# Altium PCB PCB3.PcbDoc
Units mil, origin at the board's own origin, x right, y up, seen from the top; angles counter-clockwise.
Board outline 3965.03 x 3405.03 mil, 2 copper layers (Top Layer, Bottom Layer); 50 components, 53 nets, 201 pads, 12 vias.
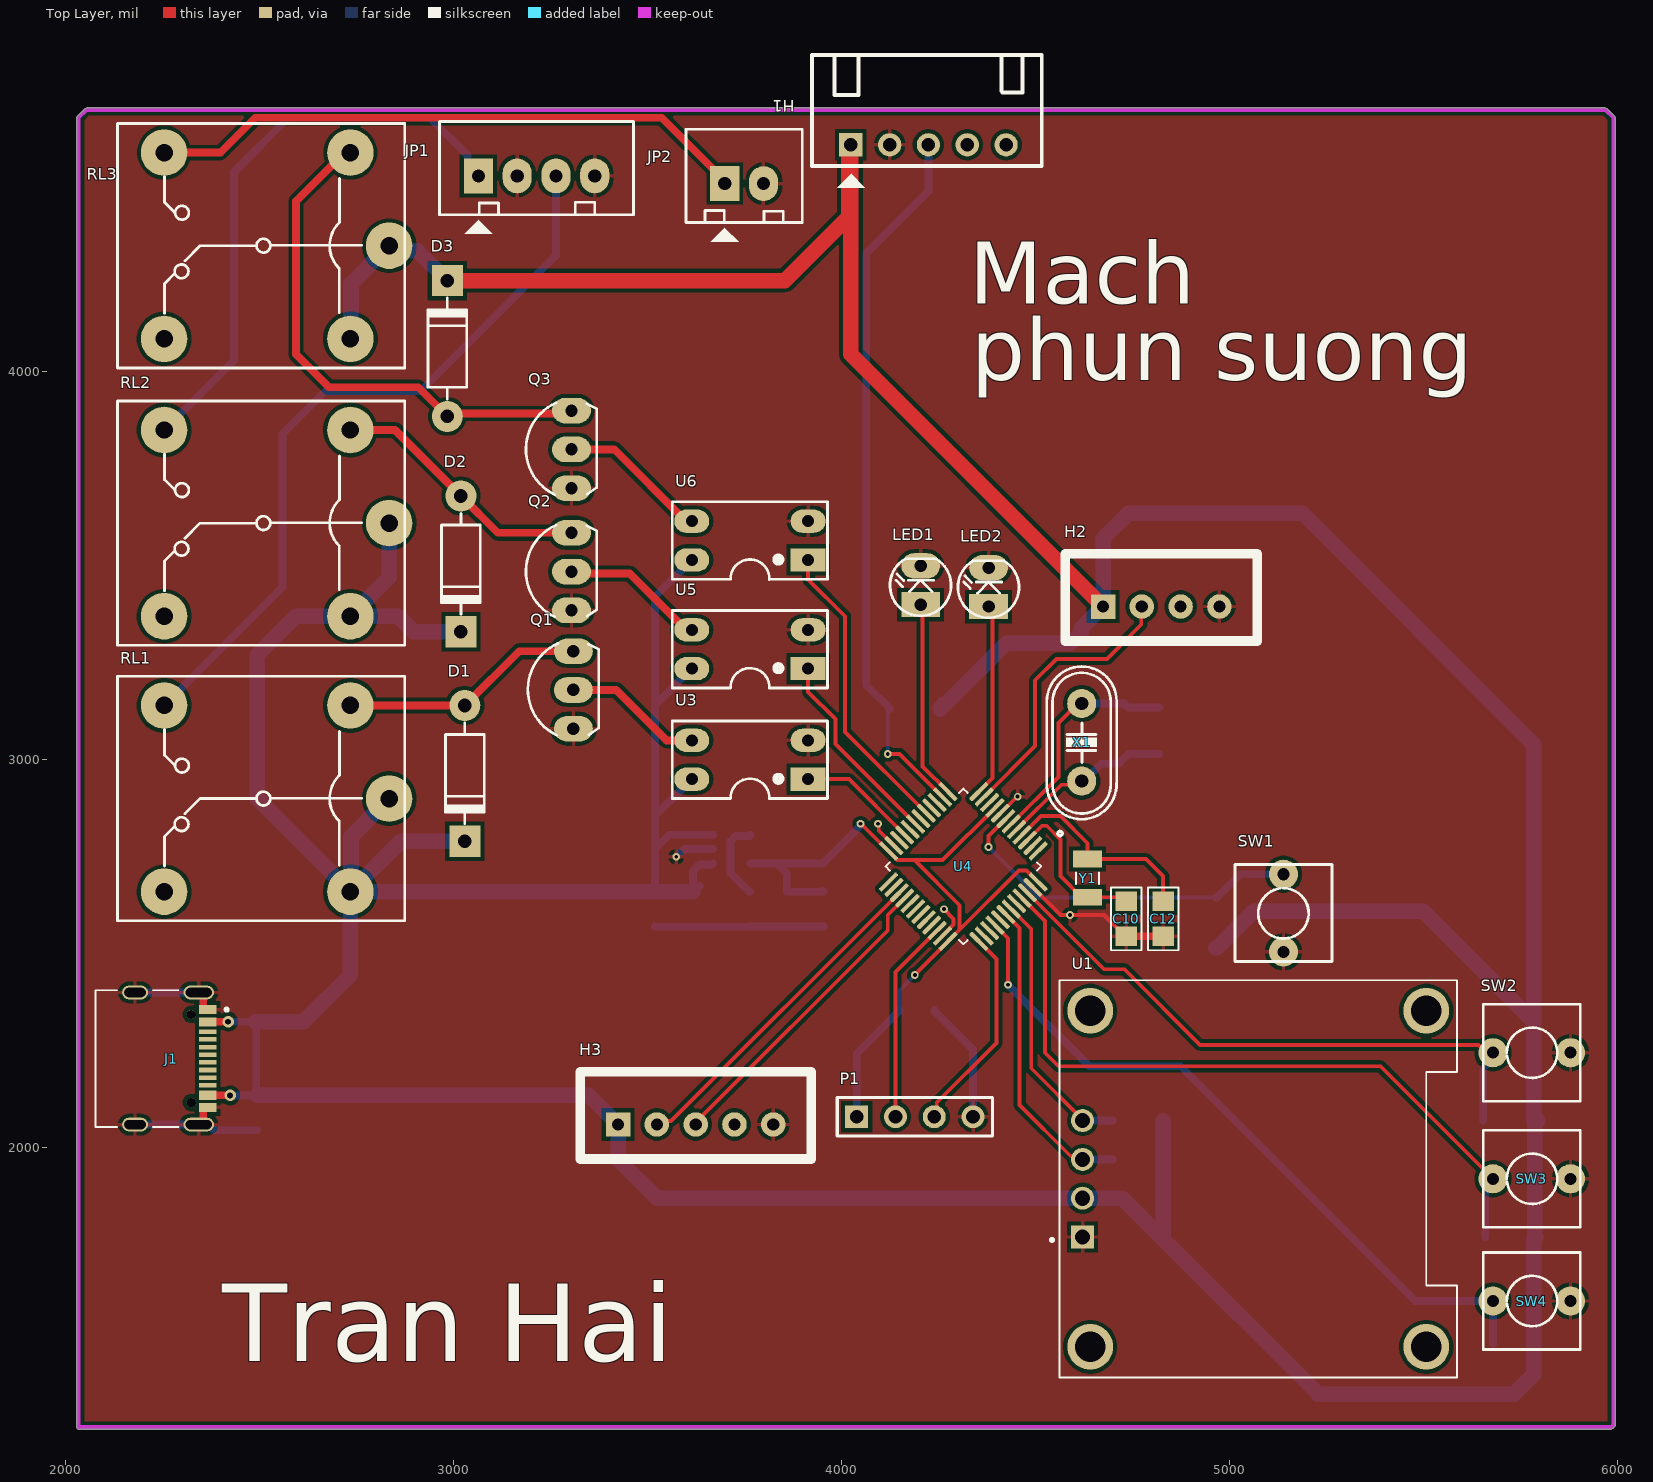
[diagram p0: Top Layer view]
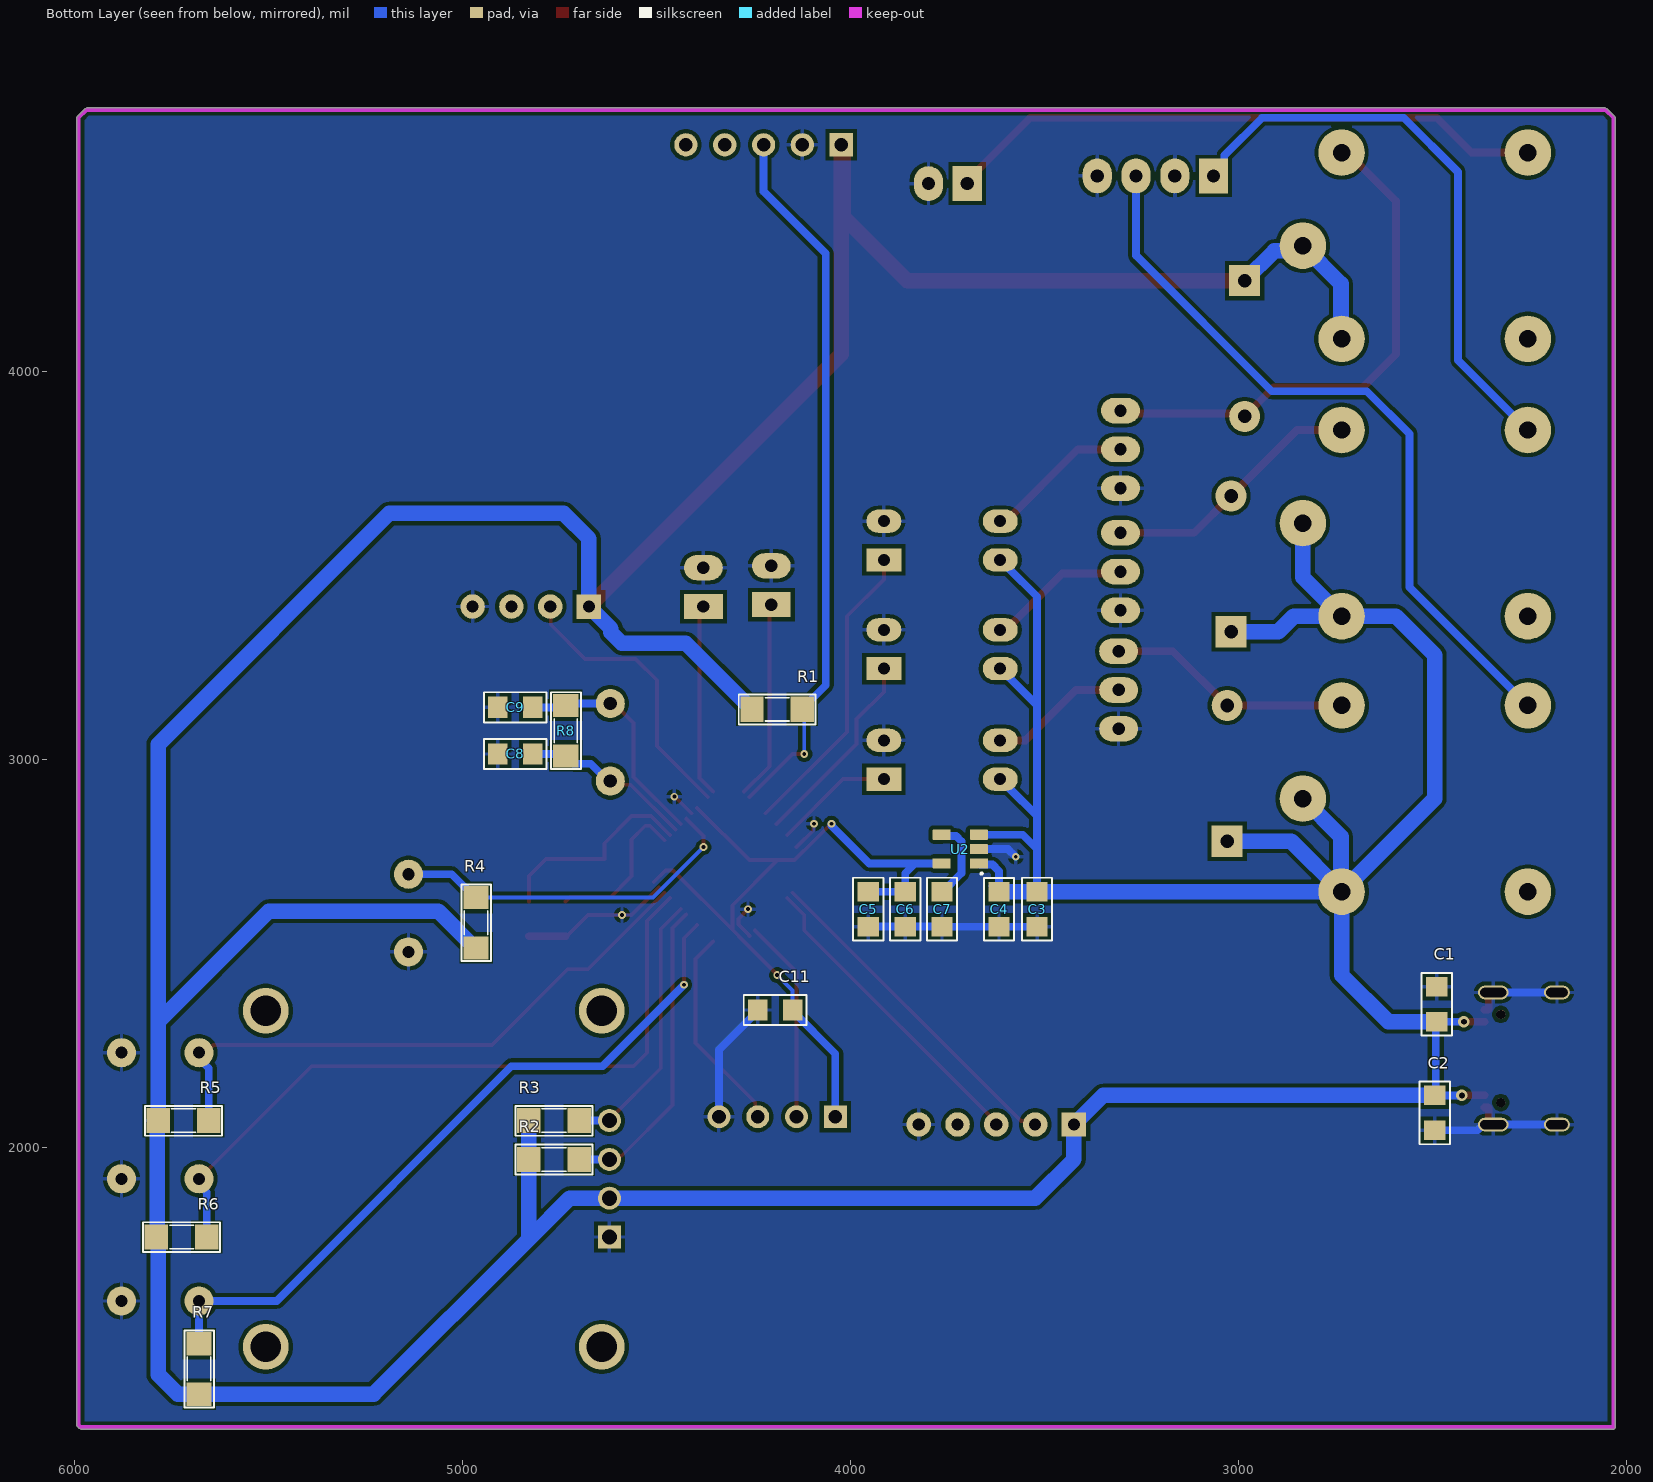
[diagram p1: Bottom Layer view, seen from below]
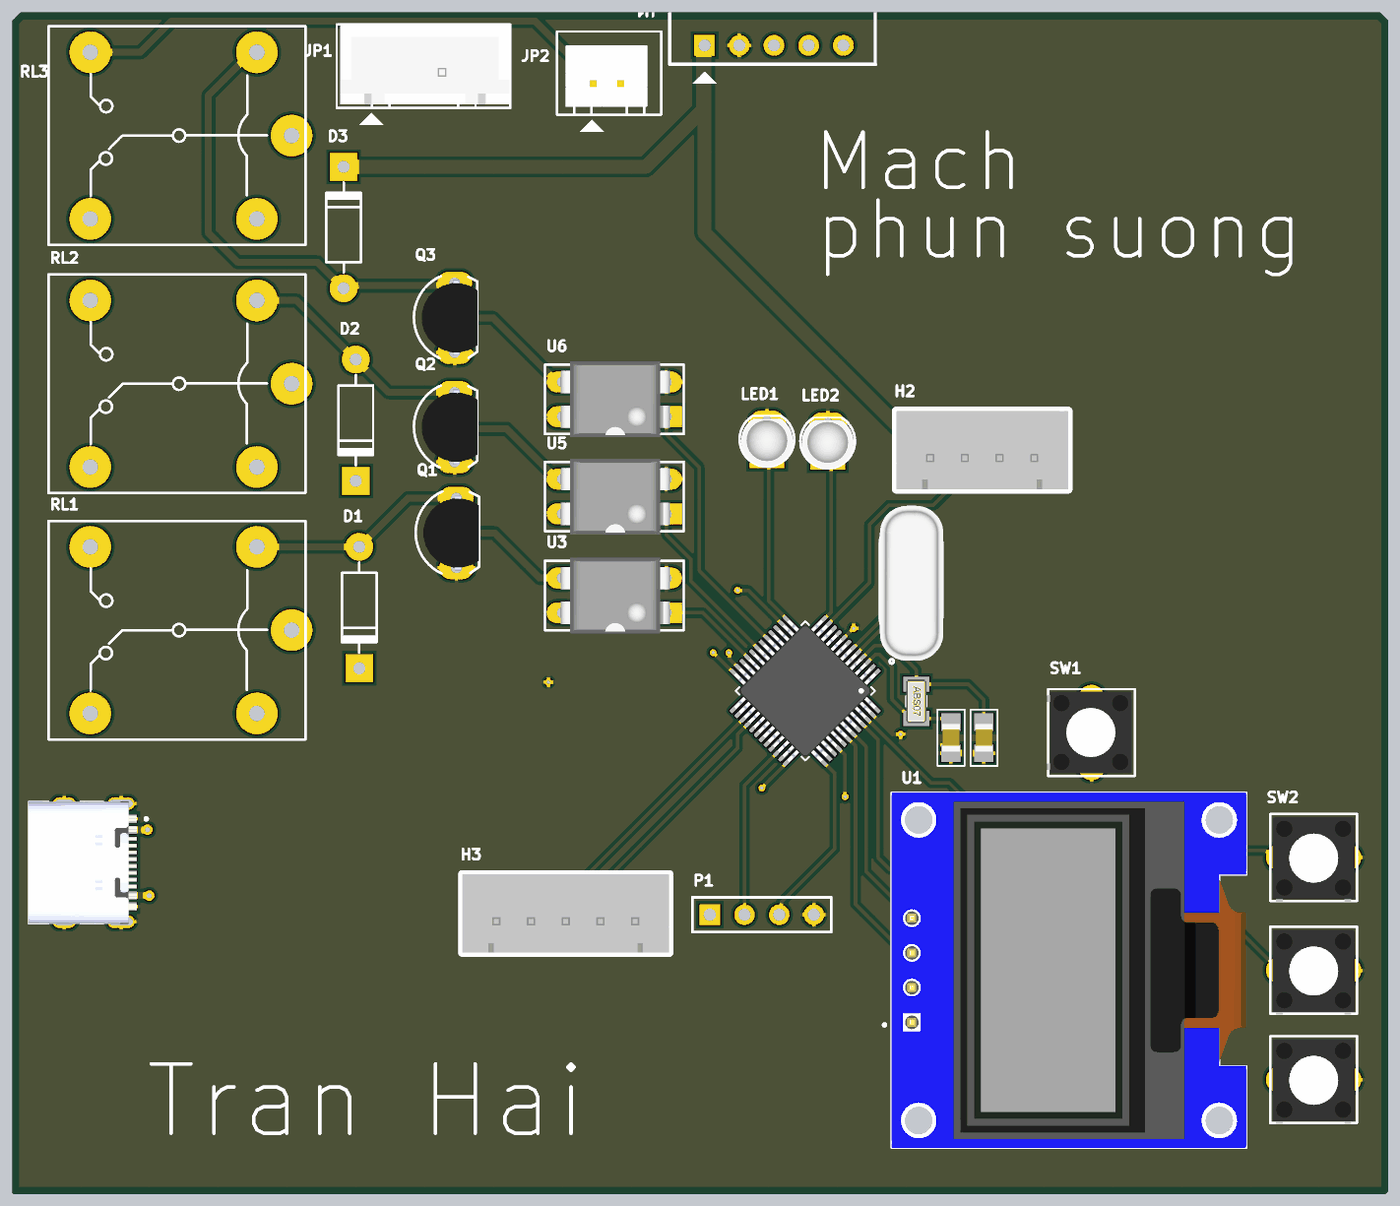
[diagram p2: 3D render of the assembled board from above, using the file's embedded part models]
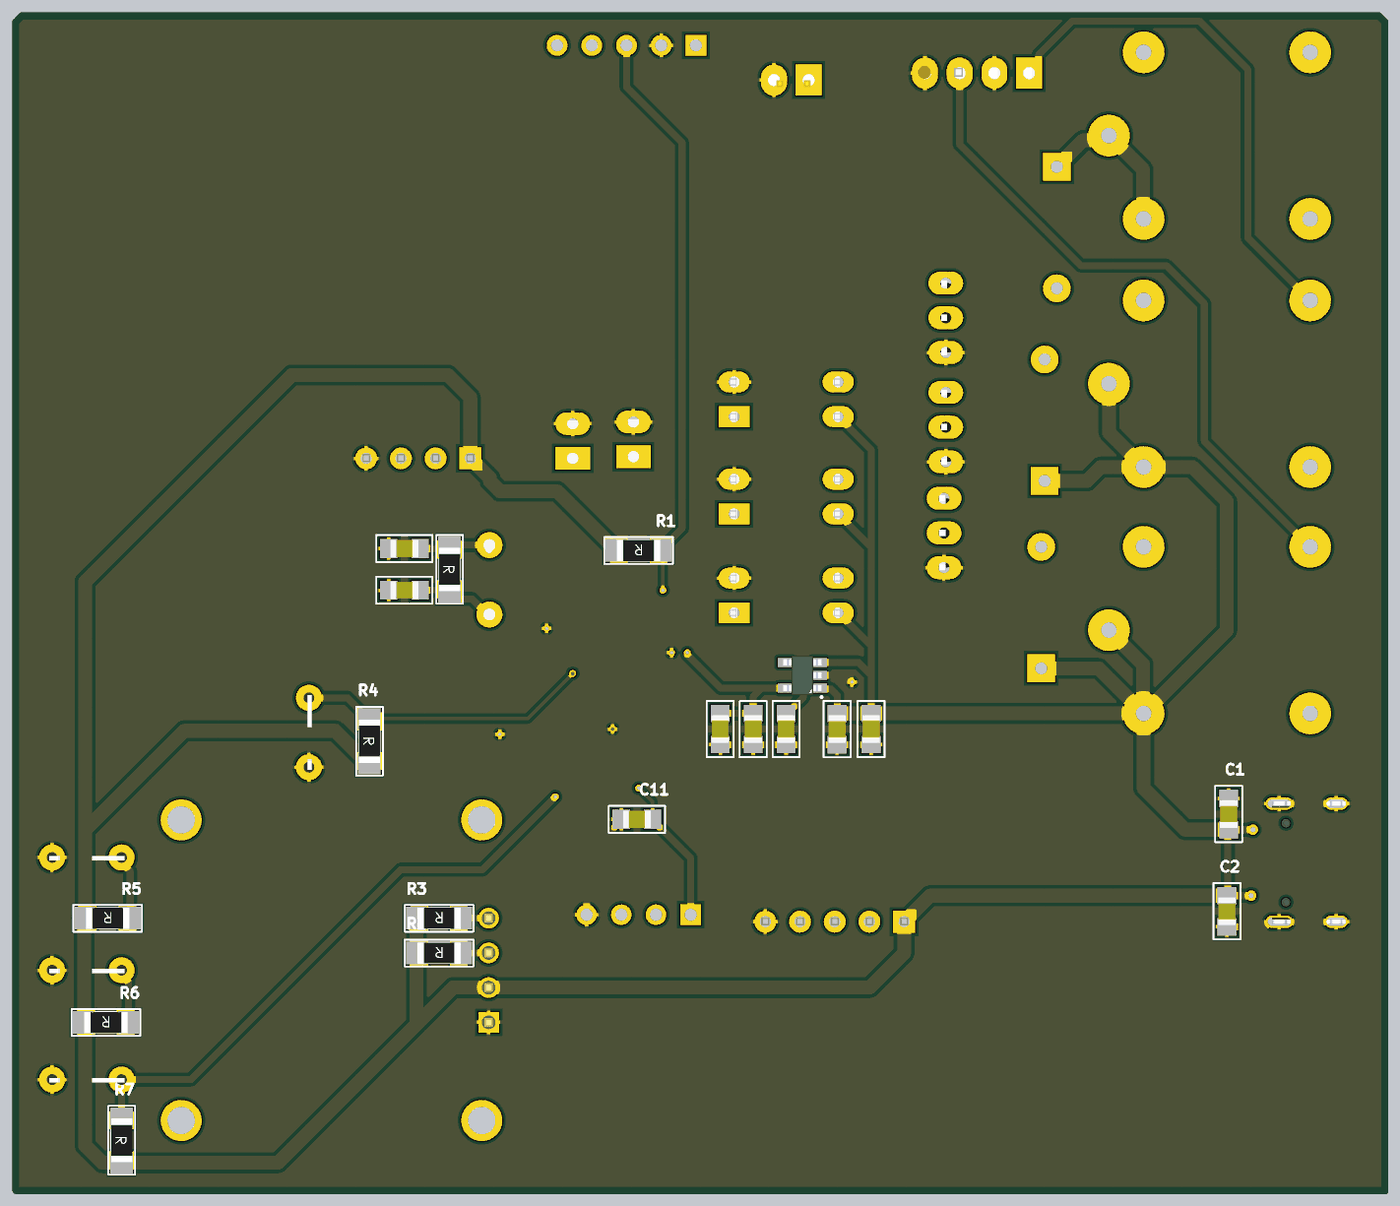
[diagram p3: 3D render of the assembled board from below, using the file's embedded part models]

## Layer stack, top to bottom
Top Solder: solder mask 0.4, Solder Resist, Dk 3.5
Top Layer: signal copper 1.4
Dielectric 1: dielectric 12.6, FR-4, Dk 4.8
Bottom Layer: signal copper 1.4
Bottom Solder: solder mask 0.4, Solder Resist, Dk 3.5

## Board outline
2029.98,1280 ccw(c2035,1280) 2035,1274.98 5985,1274.98 5988.55,1276.45 5993.55,1281.45 5995.02,1285 5995.02,4655 5993.55,4658.55 5973.55,4678.55 5970,4680.02 2055,4680.02 2051.45,4678.55 2031.45,4658.55 2029.98,4655

## Design rules (kind name [scope] priority, off if disabled: settings)
Clearance [All] p1: gap=10 ignorepadtopadclearanceinfootprint=FALSE except(0: Arc-Hole Track-Hole SMDPad-Hole THPad-Hole Text-Hole; 5: Arc-Arc Arc-Track Arc-SMDPad Arc-THPad Track-Track Track-SMDPad Track-THPad SMDPad-SMDPad SMDPad-THPad THPad-THPad)
PolygonConnect [All] p1: connectstyle=Relief reliefconductorwidth=10 reliefentries=4 polygonreliefangle="90 Angle" airgapwidth=10
RoutingVias [All] p1: holewidth=15 width=30 viastyle="Through Hole" minholewidth=10 minwidth=20 maxholewidth=28 maxwidth=50
SolderMaskExpansion [All] p1: expansion=4 istentingtop=FALSE
Width [All] p1: maxlimit=40 minlimit=10 preferedwidth=20 minimp=50.000000 maximp=50.000000 favimp=50.000000
30 further rules are at their usual default settings.

## Components (designator, comment, footprint, x,y, rotation, side; value= is the part's Value field where it differs from the comment)
C1 "0805" C-0805 2490,2370 r270 bottom value=103
C2 "0805" C-0805 2495,2090 r90 bottom value=103
C3 "103" C-0805 3520,2615 r90 bottom
C4 "103" C-0805 3617.99,2614.84 r90 bottom
C5 "103" C-0805 3955,2615 r90 bottom
C6 "103" C-0805 3860,2615 r90 bottom
C7 "103" C-0805 3765,2615 r90 bottom
C8 "103" C-0805 4865,3015 r180 bottom
C9 "103" C-0805 4865,3135 r180 bottom
C10 "103" C-0805 4735,2590 r90 top
C11 "103" C-0805 4195,2355 r180 bottom
C12 "103" C-0805 4830,2590 r90 top
D1 "1N4007" D1A 3030,3140 r90 top
D2 "1N4007" D1A 3020,3680 r90 top
D3 "1N4007" D1A 2985,3885 r270 top
H1 "HLK LD2410c" "Header 5P DC 2.54" 4025,4585 r90 top
H2 "DHT22" XH2.54M-4 4675,3395 r0 top
H3 "HY SRF05" XH2.54M-5 3425,2060 r0 top
J1 "TYPE-C-31-M-12" HRO_TYPE-C-31-M-12 2180,2230 r270 top
JP1 "PHUN SUONG" CON4 3065,4505 r0 top value="Connector 4"
JP2 "QUAT" CON2 3700,4485 r0 top value="Connector 2"
LED1 "LED MODE" LED-3 4205,3400 r90 top value="LED 3 ly Single Colour"
LED2 "LED STATE" LED-3 4380,3395 r90 top value="LED 3 ly Single Colour"
P1 "Header 4" HDR1X4 4040,2080 r0 top
Q1 "NPN_EBC" QTO-92 3310,3180 r90 top
Q2 "NPN_EBC" QTO-92 3305,3485 r90 top
Q3 "NPN_EBC" QTO-92 3305,3800 r90 top
R1 "1k" SM-1206 4190,3130 r0 bottom value="R1/4W - 1K"
R2 "1k" SM-1206 4765,1970 r0 bottom value="R1/4W - 1K"
R3 "1k" SM-1206 4765,2070 r0 bottom value="R1/4W - 1K"
R4 "1k" SM-1206 4966,2580 r270 bottom value="R1/4W - 1K"
R5 "1k" SM-1206 5720,2070 r0 bottom value="R1/4W - 1K"
R6 "1k" SM-1206 5725,1770 r0 bottom value="R1/4W - 1K"
R7 "1k" SM-1206 5680,1430 r270 bottom value="R1/4W - 1K"
R8 "1k" SM-1206 4735,3075 r270 bottom value="R1/4W - 1K"
RL1 "Relay 10A/12V" RL_SPDT_10A 2835,2900 r180 top value="Relay SPDT, 10A, 12V"
RL2 "Relay 10A/12V" RL_SPDT_10A 2835,3610 r180 top value="Relay SPDT, 10A, 12V"
RL3 "Relay 10A/12V" RL_SPDT_10A 2835,4325 r180 top value="Relay SPDT, 10A, 12V"
SW1 "SW" SW2 5140,2505 r90 top value="SW chip 2 pin"
SW2 "SW" SW2 5880,2245 r180 top value="SW chip 2 pin"
SW3 "SW" SW2 5880,1920 r180 top value="SW chip 2 pin"
SW4 "SW" SW2 5880,1605 r180 top value="SW chip 2 pin"
U1 "DM-OLED096-636" MODULE_DM-OLED096-636 5075,1920 r90 top
U2 "RT9193-33GB" SOT94P279X129-5N 3717.99,2769.84 r0 bottom
U3 "PC817" DIP4/W0.3 3915,2950 r90 top
U4 "STM32F103C8T6" QFP50P900X900X160-48N 4315,2725 r225 top
U5 "PC817" DIP4/W0.3 3915,3235 r90 top
U6 "PC817" DIP4/W0.3 3915,3515 r90 top
X1 "4Mhz" XT2 4620,3045 r90 top
Y1 "ABS07-32.768KHZ-T" XTAL_ABS07-32.768KHZ-T 4635,2695 r270 top

## Footprints (in the part's own frame and the unit in brackets; to place one, negate y for a bottom-side part, rotate by r counter-clockwise, add the part's x,y. Pads: shape width x height; smd on the part's side, far side on the other; paste and mask are expansions set on the pad)
C-0805 [mil] "Compoment SMD 80x50mil"
  rect 50x55 smd: 1(-45,0) 2(45,0)
  silkscreen extent -81,-39 81,39, body extent -40,-25 40,25, height 24
CON2 [mil] "CON2"
  rect 75x90 hole 34: 1(0,0)
  oval 75x90 hole 34: 2(100,0)
  silkscreen extent -100,-150 200,140, body extent -76,-77 160,100, height 236
CON4 [mil] "CON4"
  rect 75x90 hole 34: 1(0,0)
  oval 75x90 hole 34: 2(100,0) 3(200,0) 4(300,0)
  silkscreen extent -100,-150 400,140, body extent -90,-90 398,136, height 276
D1A [mil] "Diode 1A, W 100mil, L 350mil"
  round 80 hole 35: 1(0,0)
  rect 80x80 hole 35: 2(-350,0)
  silkscreen extent -305,-50 -45,50, body extent -366,-42 16,41, height 100
DIP4/W0.3 [mil] "4 PIN, W 300mil, Pin to pin 100mil"
  rect 60x90 hole 31: 1(0,0)
  oval 60x90 hole 31: 2(100,0) 3(100,300) 4(0,300)
  silkscreen extent -50,-50 150,350, body extent -59,-10 159,305, height 170
HDR1X4 [mm] "Connector; Header; 4 Position"
  rect 1.5x1.5 hole 0.9: 1(0,0)
  round 1.5 hole 0.9: 2(2.54,0) 3(5.08,0) 4(7.62,0)
  silkscreen extent -1.27,-1.27 8.89,1.27, body extent -1.27,-1.27 8.89,1.27, height 7
"Header 5P DC 2.54" [mil]
  rect 60x60 hole 35: 1(0,0)
  round 60 hole 35: 2(0,-100) 3(0,-200) 4(0,-300) 5(0,-400)
  silkscreen extent -110,-492 232,100
HRO_TYPE-C-31-M-12 [mm]
  rect 0.6x1.14 smd mask+0.05: A1_B12(-3.2,4.75) A4_B9(-2.4,4.75) B1_A12(3.2,4.75) B4_A9(2.4,4.75)
  rect 0.3x1.14 smd mask+0.05: A5(-1.25,4.75) A6(-0.25,4.75) A7(0.25,4.75) A8(1.25,4.75) B5(1.75,4.75) B6(0.75,4.75) B7(-0.75,4.75) B8(-1.75,4.75)
  oval 0.9x2 hole 0.6 slot 1.7 at 90 deg: S1(-4.325,4.17) S2(4.325,4.17)
  oval 0.9x1.7 hole 0.6 slot 1.4 at 90 deg: S3(-4.325,0) S4(4.325,0)
  round 0.6 hole 0.6 unplated: ""(-2.89,3.68) ""(2.89,3.68)
  silkscreen extent -4.47,-2.6 4.47,6.1, body extent -4.47,-2.6 4.47,5.31, height 3.31
LED-3 [mil] "LED 2 PIN, 3ly Only colour"
  rect 65x100 hole 32: 1(0,0)
  oval 65x100 hole 32: 2(100,0)
  silkscreen extent -29,-78 118,79, body extent -29,-75 109,75, height 256
MODULE_DM-OLED096-636 [mm]
  rect 1.508x1.508 / inner round 1.508 / far side rect 1.508x1.508 hole 1: 1(-3.81,11.5)
  round 1.508 hole 1: 2(-1.27,11.5) 3(1.27,11.5) 4(3.81,11.5)
  round 3 hole 2: S1(-11,11) S2(11,11) S3(11,-11) S4(-11,-11)
  silkscreen extent -13,-13 13,13.6, body extent -13,-13 13,13, height 5.66
QFP50P900X900X160-48N [mm]
  rrect50% 1.56x0.28 smd: 1(-4.18,2.75) 2(-4.18,2.25) 3(-4.18,1.75) 4(-4.18,1.25) 5(-4.18,0.75) 6(-4.18,0.25) 7(-4.18,-0.25) 8(-4.18,-0.75) 9(-4.18,-1.25) 10(-4.18,-1.75) 11(-4.18,-2.25) 12(-4.18,-2.75) 25(4.18,-2.75) 26(4.18,-2.25) 27(4.18,-1.75) 28(4.18,-1.25) 29(4.18,-0.75) 30(4.18,-0.25) 31(4.18,0.25) 32(4.18,0.75) 33(4.18,1.25) 34(4.18,1.75) 35(4.18,2.25) 36(4.18,2.75)
  rrect50% 0.28x1.56 smd: 13(-2.75,-4.18) 14(-2.25,-4.18) 15(-1.75,-4.18) 16(-1.25,-4.18) 17(-0.75,-4.18) 18(-0.25,-4.18) 19(0.25,-4.18) 20(0.75,-4.18) 21(1.25,-4.18) 22(1.75,-4.18) 23(2.25,-4.18) 24(2.75,-4.18) 37(2.75,4.18) 38(2.25,4.18) 39(1.75,4.18) 40(1.25,4.18) 41(0.75,4.18) 42(0.25,4.18) 43(-0.25,4.18) 44(-0.75,4.18) 45(-1.25,4.18) 46(-1.75,4.18) 47(-2.25,4.18) 48(-2.75,4.18)
  silkscreen extent -6.15,-3.6 3.6,3.6, body extent -4.5,-4.5 4.5,4.5, height 1.6
QTO-92 [mil] "TO-92"
  oval 66x100 hole 32: 1(-100,0) 2(0,0) 3(100,0)
  silkscreen extent -117,-65 120,118, body extent -109,-66 109,95, height 385
RL_SPDT_10A [mil] "Relay SPDT, 5 pin, 10A,W 650mil, L 800mil, H 800mil"
  round 120 hole 45: 1(0,0) 2(580,240) 3(580,-240) 4(100,-240) 5(100,240)
  silkscreen extent -40,-315 700,315
SM-1206 [mil] "Compoment SMD 120x60mil"
  rect 60x65 smd: 1(-65,0) 2(65,0)
  silkscreen extent -99,-38 99,39, body extent -83,-35 83,36, height 25
SOT94P279X129-5N [mm]
  rrect12% 1.17x0.67 smd: 1(-1.22,0.94) 2(-1.22,0) 3(-1.22,-0.94) 4(1.22,-0.94) 5(1.22,0.94)
  silkscreen extent -1.47,1.53 -1.33,1.67, body extent -1.4,-1.45 1.4,1.45, height 1.3
SW2 [mil] "SW button 2pin, 250x 250 mil"
  round 75 hole 31: 1(0,0) 2(200,0)
  silkscreen extent -25,-125 225,125, body extent -18,-116 218,128, height 197
XH2.54M-4 [mm]
  rect 1.6x1.6 hole 0.8: 1(0,0)
  round 1.6 hole 0.8: 2(2.54,0) 3(5.08,0) 4(7.62,0)
  silkscreen extent -2.48,-2.26 10.1,3.46, body extent -2.48,-2.26 10.1,3.48, height 6.91
XH2.54M-5 [mm]
  rect 1.6x1.6 hole 0.8: 1(0,0)
  round 1.6 hole 0.8: 2(2.54,0) 3(5.08,0) 4(7.62,0) 5(10.16,0)
  silkscreen extent -2.48,-2.26 12.64,3.46, body extent -2.48,-2.26 12.64,3.48, height 6.91
XT2 [mil] "Footpin for Crystal 2 pin"
  round 75 hole 34: 1(-100,0) 2(100,0)
  silkscreen extent -198,-90 195,90, body extent -233,-93 213,90, height 138
XTAL_ABS07-32.768KHZ-T [mm]
  rect 1.1x1.9 smd: 1(-1.25,0) 2(1.25,0)
  silkscreen extent -0.38,-0.75 0.38,0.75, body extent -1.6,-0.75 1.6,0.75, height 0.89

## Part data
C1 C2 C3 C4 C5 C6 C7 C8 C9 C10 C11 C12: library part C, "Cap SMD"
D1 D2 D3: library part D1A, "Diode 1A"
H1: library part "Header 5P 2.54 Duc Cong", "Cắm", Chung_Loai=Cắm, Don_Vi=Con, Ma_Hang=MH001308, Ten_Linh_Kien="Header 5P XH2.54-5P Đực Cong"
H2: library part "Header 4P 2.54 Duc Thang", "Cắm", Chung_Loai=Cắm, Don_Vi=Con, Ma_Hang=MH001285, Ten_Linh_Kien="Header 4P XH2.54-4P Đực Thẳng"
H3: library part "Header 5P 2.54 Duc Thang", "Cắm", Chung_Loai=Cắm, Don_Vi=Con, Ma_Hang=MH001298, Ten_Linh_Kien="Header 5P XH2.54-5P Đực Thẳng"
J1: "USB Connectors 24 Receptacle 1 8.94*7.3mm RoHS", Package=Package, Availability="Not in stock", Check_prices=https://www.snapeda.com/parts/TYPE-C-31-M-12/HRO+Electronics+Co.%252C+Ltd./view-part/?ref=eda, MF="HRO Electronics Co., Ltd.", MP=TYPE-C-31-M-12, Price=None, SnapEDA_Link=https://www.snapeda.com/parts/TYPE-C-31-M-12/HRO+Electronics+Co.%252C+Ltd./view-part/?ref=snap
JP1: library part Con4, "Connector 4"
JP2: library part Con2, "Connector 2"
LED1 LED2: library part LED_THU, "LED Single colour Green and Red"
P1: "Header, 4-Pin", LatestRevisionDate=17-Jul-2002, LatestRevisionNote="Re-released for DXP Platform.", Publisher="Altium Limited"
Q1 Q2 Q3: "NPN Transistor"
R1 R4 R5 R6 R7: library part RES, "Resistor 1/4W"
R2 R3 R8: library part R, "Resistor 1/4W"
RL1 RL2 RL3: library part "Relay 1", "Relay SPDT,10A - 12VDC 5 Pin"
SW1 SW2 SW3 SW4: library part SW2, "Switch button 2 pin"
U1: "0.96â€ 128 X 64 MONOCHROME GRAPHIC OLED DISPLAY MODULE - I2C", Package=Package, Check_prices=https://www.snapeda.com/parts/DM-OLED096-636/Display+Module/view-part/?ref=eda, MF="Display Module", MP=DM-OLED096-636, SnapEDA_Link=https://www.snapeda.com/parts/DM-OLED096-636/Display+Module/view-part/?ref=snap
U2: "Linear Voltage Regulator IC Positive Fixed 1 Output 300mA TSOT-23-5", Package="SOT-23-5 Richtek", Check_prices=https://www.snapeda.com/parts/RT9193-33GB/Richtek+USA+Inc./view-part/?ref=eda, Digi-Key_Part_Number=1028-1014-2-ND, MF="Richtek USA", MP=RT9193-33GB, Purchase-URL=https://pricing.snapeda.com/search/part/RT9193-33GB/?ref=eda, SnapEDA_Link=https://www.snapeda.com/parts/RT9193-33GB/Richtek+USA+Inc./view-part/?ref=snap
U3 U5 U6: "Single Opto"
U4: "ARM® Cortex®-M3 STM32F1 Microcontroller IC 32-Bit 72MHz 64KB (64K x 8) FLASH 48-LQFP (7x7)", Package="LQFP-48 STMicroelectronics", Check_prices=https://www.snapeda.com/parts/STM32F103C8T6/STMicroelectronics/view-part/?ref=eda, MF=STMicroelectronics, MP=STM32F103C8T6, SnapEDA_Link=https://www.snapeda.com/parts/STM32F103C8T6/STMicroelectronics/view-part/?ref=snap
X1: library part XT2, "Crystal For all Crystal 2pin."
Y1: "32.768 kHz Â±20ppm Crystal 12.5pF 70 kOhms 2-SMD, No Lead", Package="SMD-2 Abracon LLC", Availability="In Stock", Check_prices=https://www.snapeda.com/parts/ABS07-32.768KHZ-T/Abracon+LLC/view-part/?ref=eda, MF=Abracon, MP=ABS07-32.768KHZ-T, Price=None, Purchase-URL=https://pricing.snapeda.com/search/part/ABS07-32.768KHZ-T/?ref=eda, SnapEDA_Link=https://www.snapeda.com/parts/ABS07-32.768KHZ-T/Abracon+LLC/view-part/?ref=snap

## Via types
v1: diameter 20, hole 10, Top Layer to Bottom Layer, 10 vias
v2: diameter 30, hole 15, Top Layer to Bottom Layer, 2 vias

## Nets (pads, with @x,y where several pads share a name; then routed paths per layer and width w, separated by ;. In a path a pad name is that pad's centre, name@x,y a point inside that pad or via, vN(x,y) a via of type N, cw(c..) or ccw(c..) an arc to the next point about the centre after c; other vN are vias at no path point)
3.3V: C5.2 C6.2 C11.2 P1.1 U2.5 U4.9 U4.24 U4.36 U4.48 | length 2049.7
  Top Layer w10: v1(4050,2835) 4051.16,2835 4121.35,2764.81 U4.24 4145.58,2741.31 4188.69,2741.31 ; v1(4190,2445) 4190,2446.16 4275.19,2531.35 U4.36 4305,2561.89 ; U4.9 4261.71,2741.31 4188.69,2741.31 ; U4.48 4478.11,2715 4458.11,2715 4305,2561.89 ; 4188.69,2741.31 4305,2625 4305,2561.89
  Bottom Layer w10: C11.2 4150,2405 v1(4190,2445)
  Bottom Layer w20: U2.5 3835,2732.83 ; C5.2@3952.83,2662.17 C5.2 C6.2 3860,2707.83 3835,2732.83 ; P1.1 4040,2242.5 4150,2352.5 C11.2 ; v1(4050,2835) 4050,2830 3952.83,2732.83 3835,2732.83
5V: C1.2 C2.2 C3.2 C4.2 D1.2 D2.2 D3.2 H1.1 H2.1 H3.1 J1.A4_B9 J1.B4_A9 R1.2 R2.2 R3.2 R4.2 R5.2 R6.2 R7.2 RL1.1 RL1.5 RL2.1 RL2.5 RL3.1 RL3.5 U1.2 U2.1 U2.3 U3.4 U5.4 U6.4 | length 17421.4
  Top Layer w20: J1.B4_A9 2367.26,2135.26 2424.74,2135.26 v2(2425,2135) ; J1.A4_B9 2367.26,2324.74 2419.74,2324.74 v2(2420,2325)
  Top Layer w40: D3.2 3855,4235 4020,4400 4020,4580 H1.1 4025,4045 H2.1
  Bottom Layer w20: v2(2420,2325) C1.2 2492.5,2322.5 2492.5,2137.5 C2.2 v2(2425,2135) ; C3.2 3520,2770 ; U3.4 3610.82,2950 3592.35,2931.52 3592.35,2927.35 3520,2855 ; U5.4 3610.82,3235 3592.35,3216.52 3592.35,3212.35 3520,3140 ; U6.4 3610.82,3515 3592.35,3496.52 3592.35,3492.35 3520,3420 3520,3140 ; C4.2@3635.49,2674.84 3620.49,2659.84 C4.2 3617.99,2712.99 3635,2730 3667.13,2730 U2.1 ; U2.3 3556.85,2806.85 3520,2770 ; 3520,2770 3520,2855 ; 3520,2855 3520,3140
  Bottom Layer w40: C1.2 2615,2325 2735,2445 RL1.5 ; C2.2 3350,2135 H3.1 3425,1970 3525,1870 U1.2 4725,1870 4830,1765 ; RL3.5 2736.65,4086.65 2736.65,4226.65 RL3.1 2848.43,4311.57 2908.43,4311.57 D3.2 ; RL1.1 2736.65,2801.65 RL1.5@2736.65,2661.65 ; RL2.1 2835,3470.32 2735,3370.32 RL2.5 ; D2.2 2898.32,3330 2858.32,3370 RL2.5 ; D1.2 2865,2790 RL1.5@2736.65,2661.65 ; C4.2@3617.91,2659.92 3520.08,2659.92 C3.2 RL1.5 ; R1.2 4255,3132.5 4265,3142.5 4267.5,3142.5 4425,3300 4590,3300 4618.28,3328.28 4618.28,3338.28 H2.1 4675,3570 4740,3635 5190,3635 5785,3040 5785,2325 ; R3.2 R2.2 4830,1765 ; R4.2 4968.5,2515 5063.5,2610 5500,2610 5785,2325 ; R5.2 5787.5,2067.5 5787.5,1772.5 R6.2 5785,1765 5785,1415 5735,1365 R7.2 5230,1365 4830,1765 ; R5.2@5795,2070 5785,2080 5785,2325 ; RL1.5 RL1.5@2736.65,2661.65 ; RL1.5 2495,2900 2495,3270 2595,3370 RL2.5
BOOT0: U4.44
BOOT1: U4.20
fan: JP2.1 RL3.3 | length 1557.1
  Top Layer w20: RL3.3 2400,4565 2490,4655 3537.5,4655 3700,4492.5 JP2.1
GND: C1.1 C2.1 C3.1 C4.1 C5.1 C6.1 C7.1 C8.1 C9.1 C10.1 C11.1 C12.1 H1.2 H2.4 H3.5 J1.A1_B12 J1.B1_A12 J1.S1 J1.S2 J1.S3 J1.S4 JP1.2 JP1.4 JP2.2 LED1.2 LED2.2 P1.4 Q1.1 Q2.1 Q3.1 SW1.1 SW2.1 SW3.1 SW4.1 U1.1 U2.2 U3.2 U4.8 U4.23 U4.35 U4.47 U5.2 U6.2 | length 2079.1
  Top Layer w10: v1(4095,2835) 4096.91,2833.09 4096.91,2817.81 U4.23 ; U4.23@4139.73,2775 U4.23@4140,2775 ; U4.35 4261.27,2546.72 4290,2575.45 4290,2590 v1(4265,2615) ; U4.8 4411.21,2862.25 4453.97,2905 v1(4455,2905) ; U4.47 4565,2600.27 4589.73,2600.27 v1(4590,2600) 4677.5,2600 4732.5,2545 C10.1
  Top Layer w20: J1.S2 2348.46,2059.72 2355.59,2066.85 2355.59,2102.2 2357.4,2104.02 J1.B1_A12 ; J1.S1 2348.46,2400.28 2355.59,2393.15 2355.59,2357.8 2357.4,2355.98 J1.A1_B12 ; C10.1 C12.1
  Bottom Layer w20: J1.S4 J1.S2 2370,2059.72 2384.73,2045 C2.1 ; J1.S3 J1.S1 ; C3.1 3520.08,2569.92 3617.91,2569.92 C4.1 3618.07,2569.92 3764.92,2569.92 C7.1 C6.1 C5.1 ; v1(3575,2750) 3594.84,2769.84 U2.2 ; C11.1 4240,2352.5 4340,2252.5 P1.4
NetC7_2: C7.2 U2.4 | length 210.2
  Bottom Layer w20: C7.2 3762.5,2660 3715,2707.5 3715,2790 3728.66,2803.66 3762.83,2803.66 U2.4
NetD1_1: D1.1 Q1.3 RL1.4 | length 633
  Top Layer w20: RL1.4 D1.1 3170,3280 Q1.3
NetD2_1: D2.1 Q2.3 RL2.4 | length 679.8
  Top Layer w20: RL2.4 2850,3850 D2.1 3115,3585 Q2.3
NetD3_1: D3.1 Q3.3 RL3.4 | length 1369.3
  Top Layer w20: RL3.4 2720,4565 2595,4440 2595,4045 2680,3960 2910,3960 D3.1 2992.5,3892.5 3297.5,3892.5 Q3.3
NetQ1_2: Q1.2 U3.3 | length 358.8
  Top Layer w20: Q1.2 3420,3180 3550,3050 U3.3
NetQ2_2: Q2.2 U5.3 | length 372.1
  Top Layer w20: Q2.2 3310,3480 3455,3480 3600,3335 U5.3
NetQ3_2: Q3.2 U6.3 | length 386.6
  Top Layer w20: Q3.2 3415,3800 3600,3615 U6.3
PA0: U4.10
PA1: H2.2 U4.11 | length 735.4
  Top Layer w10: U4.11 4500,3035.27 4500,3205 4555,3260 4685,3260 4773.5,3348.5 4773.5,3393.5 H2.2
PA2: LED2.1 U4.12 | length 495.8
  Top Layer w10: U4.12 4390,2953.11 4390,3385 LED2.1
PA3: LED1.1 U4.13 | length 511.2
  Top Layer w10: LED1.1 4210,3395 4210,2983.11 U4.13
PA4: H1.3 R1.1 U4.14 | length 1850.4
  Top Layer w10: v1(4120,3015) 4150.27,3015 U4.14
  Bottom Layer w10: v1(4120,3015) 4120,3125 R1.1
  Bottom Layer w20: R1.1 4125,3132.5 4065,3192.5 4065,4305 4225,4465 H1.3
PA5: U4.15
PA6: U4.16
PA7: U4.17 U6.1 | length 778.9
  Top Layer w10: U6.1 3915,3465 4010,3370 4010,3071.76 U4.17
PA8: U4.29
PA9: U4.30
PA10: U4.31
PA11: U4.32
PA12: U4.33
PA15: U4.38
PB0: U4.18
PB1: U4.19 U5.1 | length 515.2
  Top Layer w10: U5.1 3915,3175 3985,3105 3985,3041.08 U4.19
PB3: U4.39
PB4: R7.1 SW4.2 U4.40 | length 1865.3
  Top Layer w10: U4.40 4396.57,2573.43 4430,2540 v1(4430,2420)
  Bottom Layer w20: v1(4430,2420) 4640,2210 4875,2210 5480,1605 SW4.2 R7.1
PB5: U4.41
PB6: R2.1 U1.3 U4.42 | length 804.4
  Top Layer w10: U4.42 4460,2566.08 4460,2110 4590.55,1979.45 4612.8,1979.45 U1.3
  Bottom Layer w20: U1.3 R2.1
PB7: R3.1 U1.4 U4.43 | length 699.5
  Top Layer w10: U4.43 4490,2563.92 4490,2205 4622.24,2072.76 U1.4
  Bottom Layer w20: U1.4 R3.1
PB8: R6.1 SW3.2 U4.45 | length 1870.7
  Top Layer w10: U4.45 4525,2584.6 4525,2245 4560,2210 5390,2210 SW3.2
  Bottom Layer w20: R6.1 5660,1885.12 5680,1905.12 SW3.2
PB9: R5.1 SW2.2 U4.46 | length 1556.1
  Top Layer w10: U4.46 4677.44,2460 4730,2460 4925,2265 5642.41,2265 5662.41,2245 SW2.2
  Bottom Layer w20: R5.1 5655,2205.12 5680,2230.12 SW2.2
PB10: U3.1 U4.21 | length 308.2
  Top Layer w10: U3.1 4020.4,2950 U4.21
PB11: U4.22
PB12: U4.25
PB13: U4.26
PB14: H3.2 U4.27 | length 872.3
  Top Layer w10: H3.2 3534.1,2069.1 3561.66,2069.1 U4.27
PB15: H3.3 U4.28 | length 806.6
  Top Layer w10: H3.3 3625,2065 4120,2560 4120,2599.6 U4.28
PC13: U4.2
PC14: C10.2 U4.3 Y1.2 | length 406.8
  Top Layer w10: U4.3 4517.44,2830 4530,2830 4565,2795 4565,2700.04 4619.25,2645.79 Y1.2 4724.21,2645.79 C10.2
PC15: C12.2 U4.4 Y1.1 | length 537
  Top Layer w10: U4.4 4466.89,2806.57 4515.32,2855 4565,2855 4635,2785 Y1.1 4785.79,2744.21 4830,2700 C12.2
PD0: C8.2 R8.2 U4.5 X1.1 | length 448.3
  Top Layer w10: U4.5 4567.5,2935.74 4610.74,2935.74 X1.1
  Bottom Layer w20: X1.1 4625.46,2945 4670.46,2990 4715,2990 R8.2 4740,3015 C8.2
PD1: C9.2 R8.1 U4.6 X1.2 | length 595.8
  Top Layer w10: U4.6 4560,2956.08 4560,3095 4610,3145 X1.2
  Bottom Layer w20: X1.2 4730,3145 R8.1 4740,3135 C9.2
RESET: R4.1 SW1.2 U4.7 | length 930.4
  Top Layer w10: v1(4380,2775) 4380,2803.92 U4.7
  Bottom Layer w10: v1(4380,2775) 4510,2645 R4.1
  Bottom Layer w20: R4.1 4968.5,2645 5028.5,2705 SW1.2
SWDCLK: P1.3 U4.37 | length 537.1
  Top Layer w10: P1.3 4246.49,2086.49 4246.49,2116.49 4400,2270 4400,2486.89 U4.37
SWDIO: P1.2 U4.34 | length 524.4
  Top Layer w10: P1.2 4140,2452.56 U4.34
VBAT: U4.1
"voi 1": JP1.1 RL2.3 | length 1504.3
  Bottom Layer w20: RL2.3 2435,4030 2435,4515 2575,4655 2940,4655 3037.5,4557.5 3037.5,4532.5 JP1.1
"voi 2": JP1.3 RL1.3 | length 1926.9
  Bottom Layer w20: RL1.3 2560,3445 2560,3840 2670,3950 2915,3950 3265,4300 JP1.3
pads on no net: H1.4 H1.5 H2.3 H3.4 J1. J1.A5 J1.A6 J1.A7 J1.A8 J1.B5 J1.B6 J1.B7 J1.B8 RL1.2 RL2.2 RL3.2 U1.S1 U1.S2 U1.S3 U1.S4

## Polygon pours and split planes (outlines as drawn)
GND on Top Layer "GND_L01_P001" (solid, pour order 1): 2030,4655 2050,4675 2050,4680 5970,4680 5995,4655 5995,1285 5985,1275 2030,1275
GND on Bottom Layer "GND_L02_P002" (solid, pour order 2): 2030,4655 2055,4680 5970,4680 5990,4660 5995,4660 5995,1280 5990,1280 5985,1275 2030,1275

## Keep-outs
Keep-Out Layer:
  lines w10: 2035,1280 5985,1280 5990,1285 5990,4640 5990,4655 5970,4675 2055,4675 2035,4655 2035,1280

## Silkscreen, mask and mechanical layers (free items; w line width, h text height)
Top Overlay:
  text "Mach" at 4330,4175 h160
  text "phun suong" at 4335,3978.32 h160
  text "Tran Hai" at 2405,1450 h200

## Text inside footprints (layer, text, board x,y; h text height)
J1: Mechanical 13 "PCB EDGE" at 2105.2,2025.28 h30 r270